# Allegro board newtools.brd
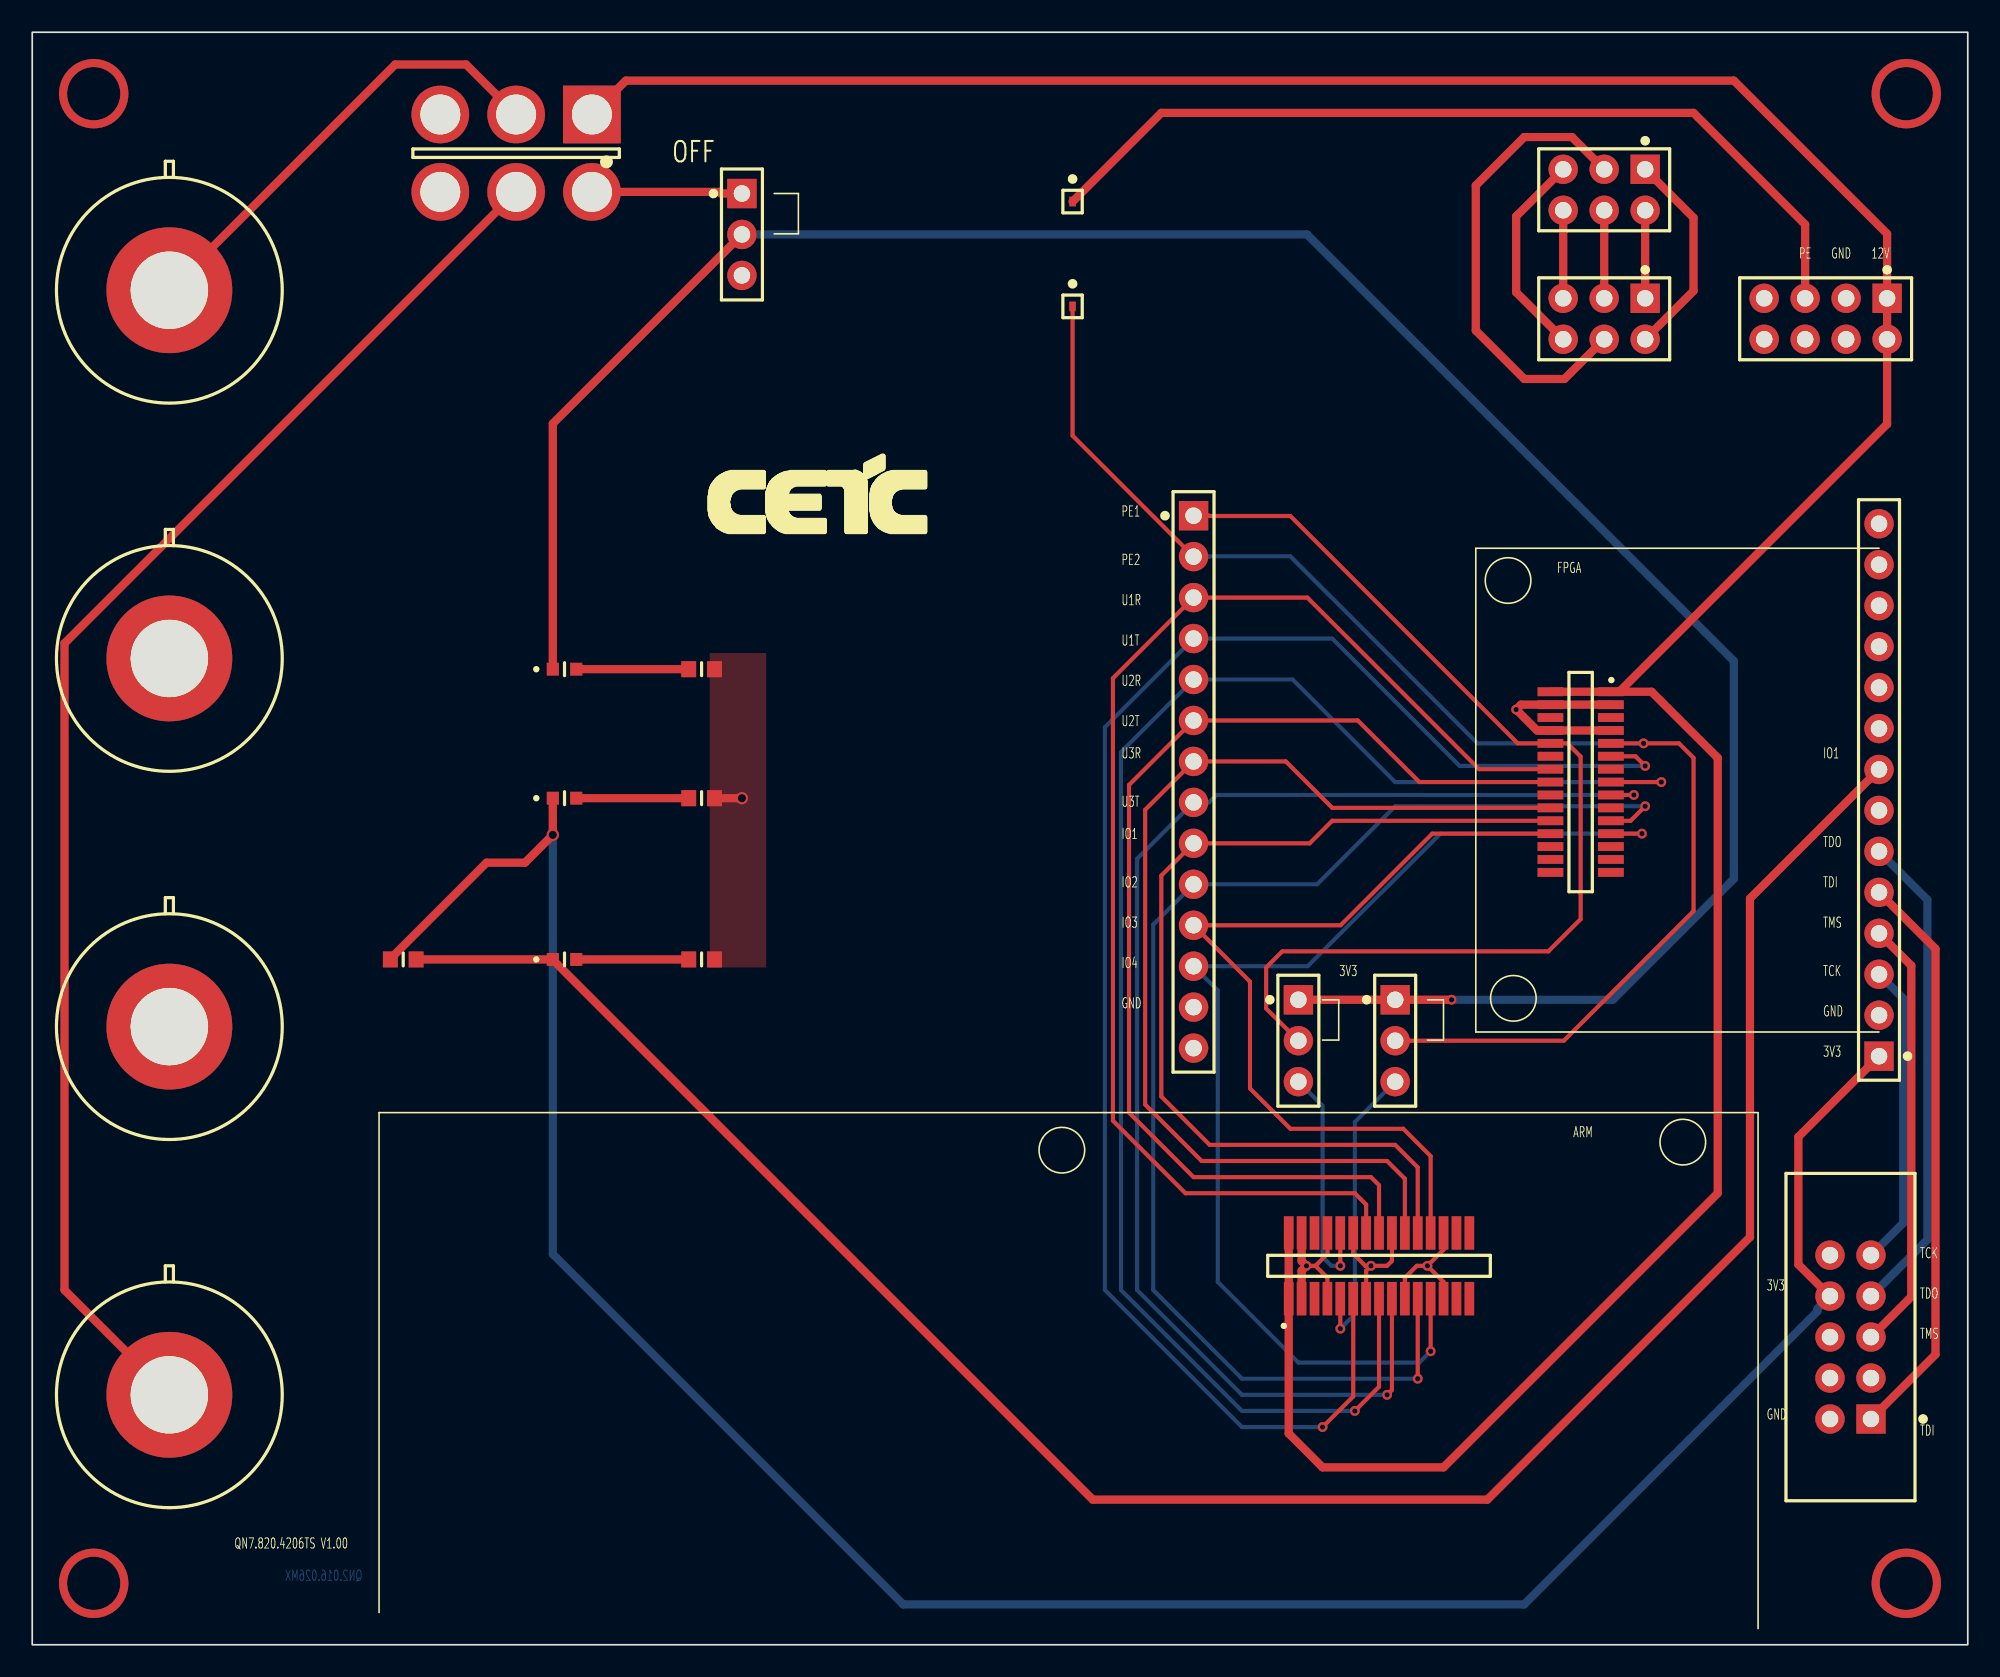
[diagram p0: board, top side]
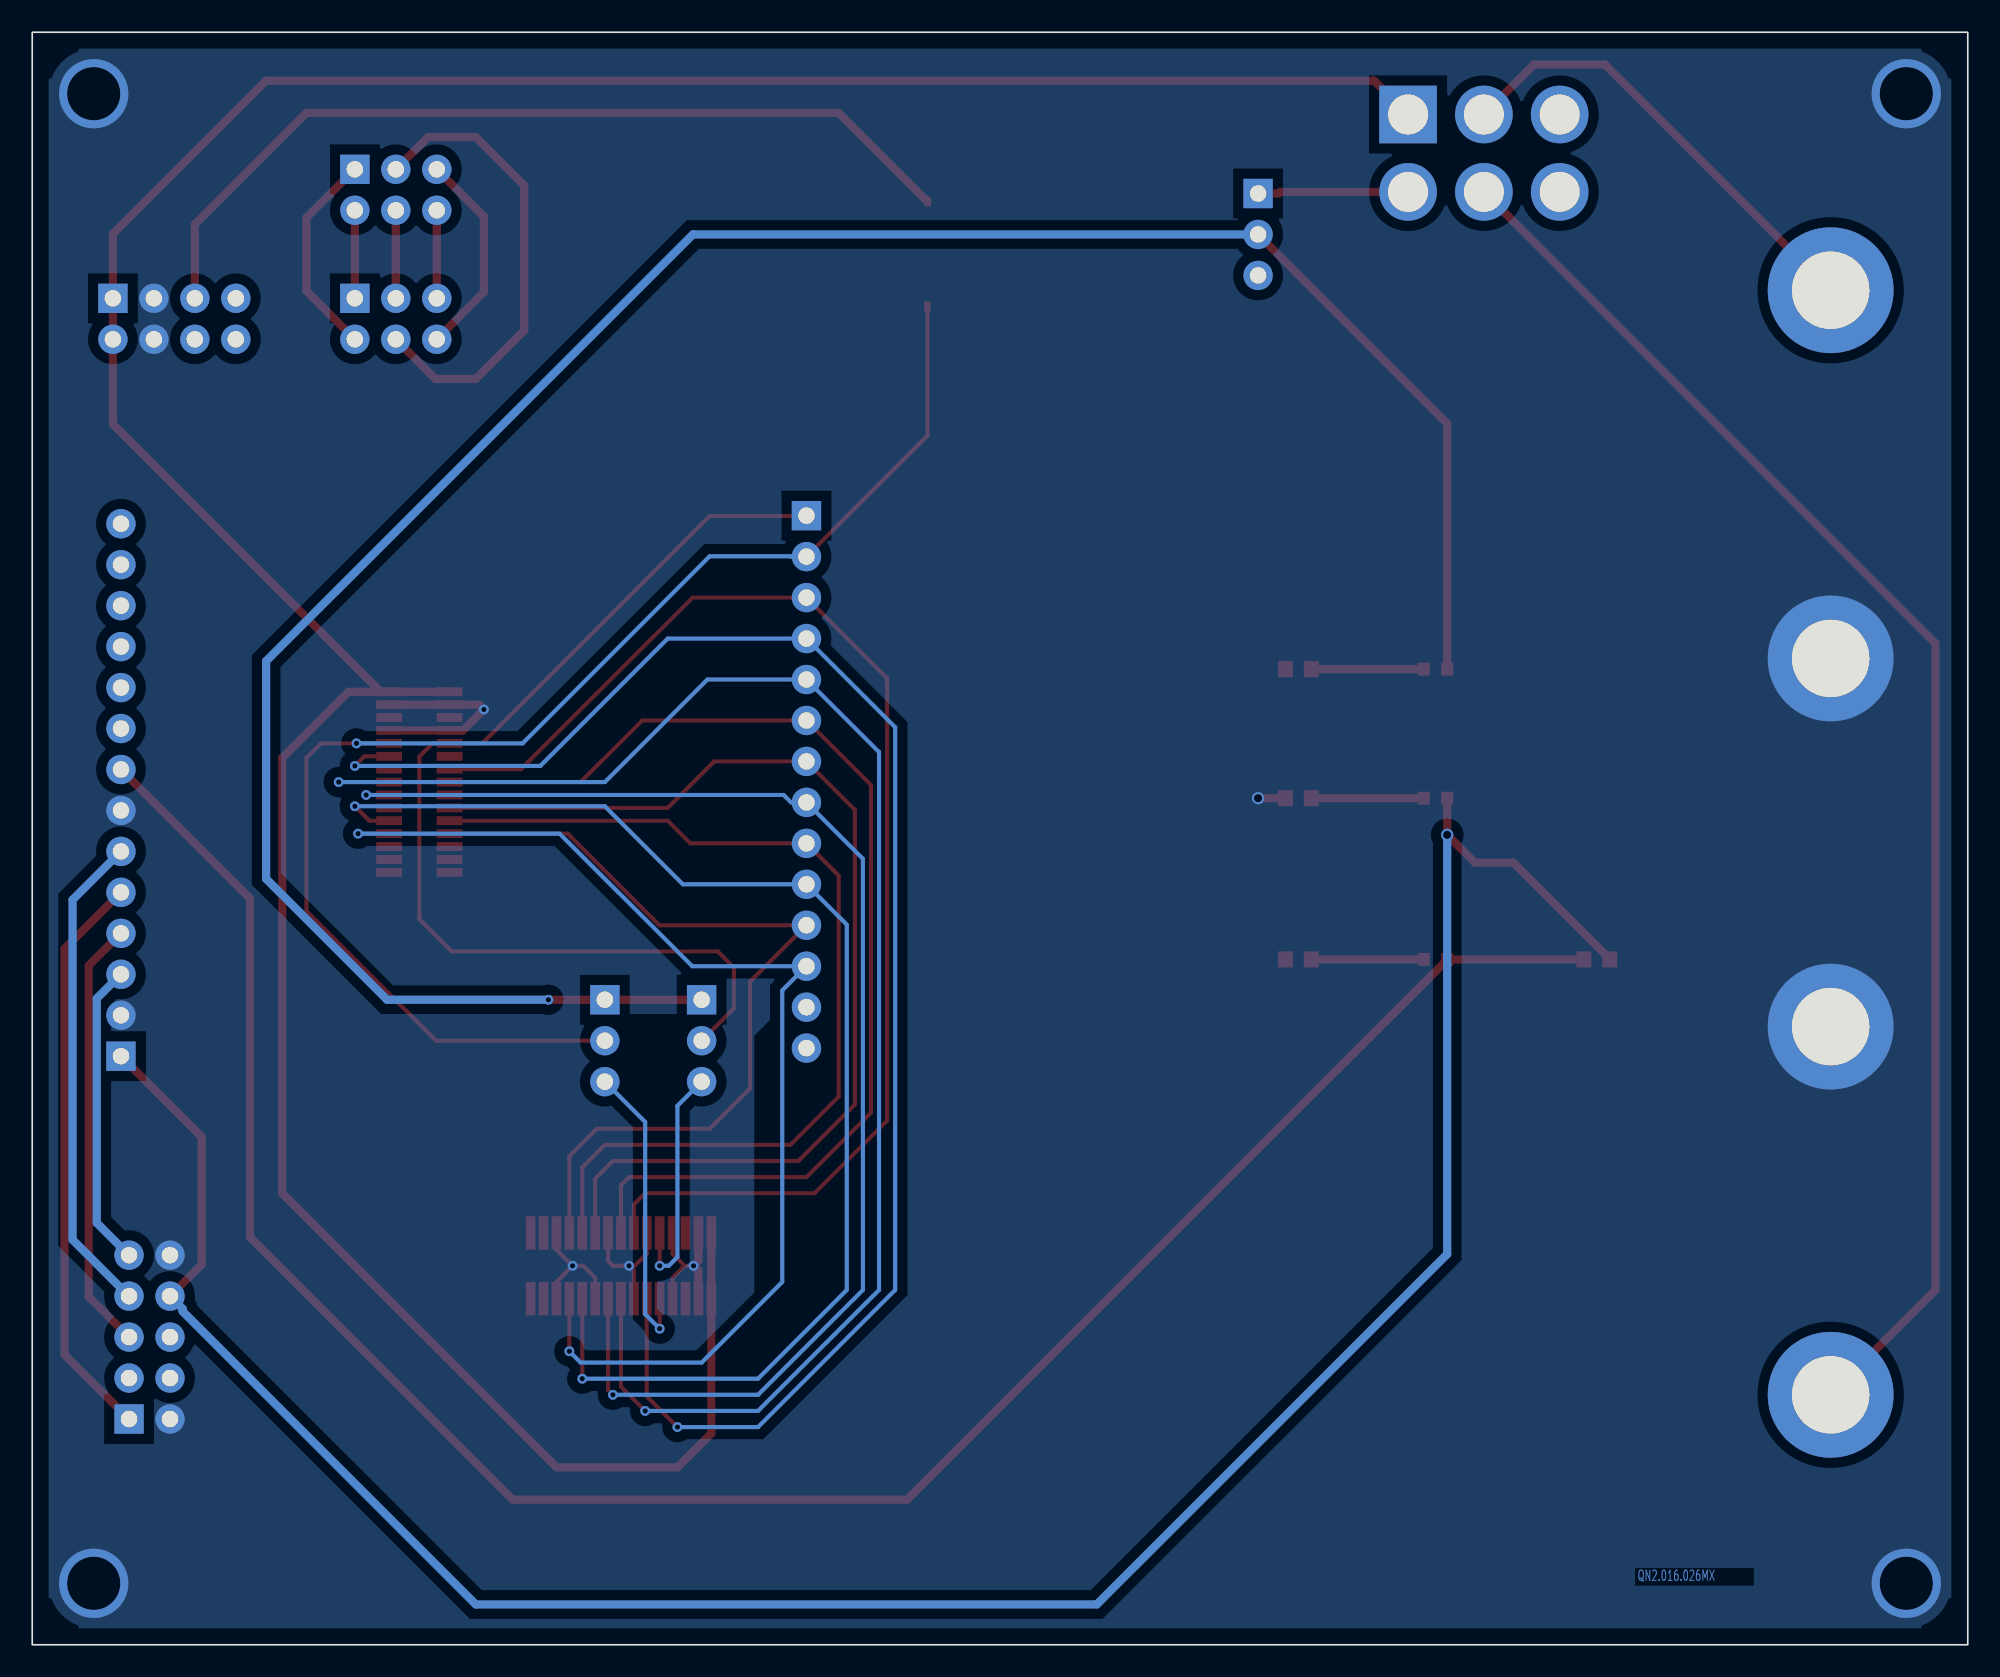
[diagram p1: board, bottom side, seen from below]

Outline 120 x 100 mm; copper layers: TOP, BOTTOM. Coordinates in mm from the lower left corner of the outline.
Outline path: rectangle 0,0 120,100 ; 0,100 0,0 120,0 120,100 0,100

## Placement (name value [footprint] x y rotation side)
CONF  LED  [LEDC0603]  33 42.5 0 top
EN1  HEADER 3  [SHDR0S254P3X1]  78.5 40 270 top
EN2  HEADER 3  [SHDR0S254P3X1]  84.5 40 270 top
EN3  HEADER 3  [SHDR0S254P3X1]  44 90 270 top
FPGA  LED  [LEDC0603]  33 52.5 0 top
GND1  CON1  [M4]  8.5 61.17 0 top
GND2  CON1  [M4]  8.5 38.33 0 top
J1  HEADER 14  [SHDR0S254P14X1]  72 70.02 270 top
J2  HEADER 3X2  [SHDR0S254P3X2]  100 91.5 180 top
J3  HEADER 3X2  [SHDR0S254P3X2]  100 83.5 180 top
J4  HEADER 15x2/SM  [52463071]  96 53.5 90 top
J5  HEADER 4X2  [SHDR0S254P4X2]  115 83.5 180 top
J6  HEADER 14  [SHDR0S254P14X1]  114.5 36.5 90 top
J7  CONN PCB 15x2-P  [533643027]  83.5 23.5 180 top
JTAG  HEADER 5X2  [SHDR0S254P5X2_JTAG]  114 14 90 top
NOREF  -  []  0 0 90 top
NOREF#2  -  []  0 0 0 top
ON  SW KEY-DPDT  [MTS202]  30 92.5 270 top
R1  220R/1%  [RESC0603]  41.5 60.5 0 top
R2  220R/1%  [RESC0603]  41.5 52.5 0 top
R3  220R/1%  [RESC0603]  41.5 42.5 0 top
R4  330R/1%  [RESC0603]  23 42.5 0 top
TP1  TEST POINT  [TP_4_6]  64.5 89.5 0 top
TP2  TEST POINT  [TP_4_6]  64.5 83 0 top
UNK3V3  CON1  [M4]  8.5 15.5 0 top
UNK12V  CON1  [M4]  8.5 84 0 top
VCC  LED  [LEDC0603]  33 60.5 0 top

## Library data of the parts
CONF FPGA VCC = LED
EN1-EN3 = HEADER 3
GND1 GND2 UNK3V3 UNK12V = CON1
J1 J6 = HEADER 14
J2 J3 = HEADER 3X2
J4 = HEADER 15x2/SM_0
J5 = HEADER 4X2
J7 = CONN PCB 15x2-P_0
JTAG = HEADER 5X2
ON = SW KEY-DPDT_0
R1-R4 = RESISTOR
TP1 TP2 = TEST POINT

## Footprints (pads in the part's own frame, mm; a bottom-side part is the same pattern mirrored in y, then rotated)
52463071
  rect 0.55x1.6 smd: 1(5.6,-1.875) 2(4.8,-1.875) 3(4,-1.875) 4(3.2,-1.875) 5(2.4,-1.875) 6(1.6,-1.875) 7(0.8,-1.875) 8(0,-1.875) 9(-0.8,-1.875) 10(-1.6,-1.875) 11(-2.4,-1.875) 12(-3.2,-1.875) 13(-4,-1.875) 14(-4.8,-1.875) 15(-5.6,-1.875) 16(-5.6,1.875) 17(-4.8,1.875) 18(-4,1.875) 19(-3.2,1.875) 20(-2.4,1.875) 21(-1.6,1.875) 22(-0.8,1.875) 23(0,1.875) 24(0.8,1.875) 25(1.6,1.875) 26(2.4,1.875) 27(3.2,1.875) 28(4,1.875) 29(4.8,1.875) 30(5.6,1.875)
533643027
  rect 0.6x2.075 smd: 1(5.6,2.038) 2(4.8,2.038) 3(4,2.038) 4(3.2,2.038) 5(2.4,2.038) 6(1.6,2.038) 7(0.8,2.038) 8(0,2.038) 9(-0.8,2.038) 10(-1.6,2.038) 11(-2.4,2.038) 12(-3.2,2.038) 13(-4,2.038) 14(-4.8,2.038) 15(-5.6,2.038) 16(-5.6,-2.038) 17(-4.8,-2.038) 18(-4,-2.038) 19(-3.2,-2.038) 20(-2.4,-2.038) 21(-1.6,-2.038) 22(-0.8,-2.038) 23(0,-2.038) 24(0.8,-2.038) 25(1.6,-2.038) 26(2.4,-2.038) 27(3.2,-2.038) 28(4,-2.038) 29(4.8,-2.038) 30(5.6,-2.038)
LEDC0603
  rect 0.75x0.8 smd: 1(0.725,0) 2(-0.725,0)
M4
  round 7.8 hole 4.8: 1(0,0)
MTS202
  rect 3.575x3.575 hole 2.475: 1(-2.4,4.7)
  round 3.575 hole 2.475: 2(-2.4,0) 3(-2.4,-4.7) 4(2.4,-4.7) 5(2.4,0) 6(2.4,4.7)
RESC0603
  rect 0.925x1 smd: 1(-0.8,0) 2(0.8,0)
SHDR0S254P3X1
  rect 1.82x1.82 hole 1.02: 1(0,0)
  round 1.82 hole 1.02: 2(2.54,0) 3(5.08,0)
SHDR0S254P3X2
  rect 1.82x1.82 hole 1.02: 1(0,0)
  round 1.82 hole 1.02: 2(0,2.54) 3(2.54,0) 4(2.54,2.54) 5(5.08,0) 6(5.08,2.54)
SHDR0S254P4X2
  rect 1.82x1.82 hole 1.02: 1(0,0)
  round 1.82 hole 1.02: 2(0,2.54) 3(2.54,0) 4(2.54,2.54) 5(5.08,0) 6(5.08,2.54) 7(7.62,0) 8(7.62,2.54)
SHDR0S254P5X2_JTAG
  rect 1.82x1.82 hole 1.02: 1(0,0)
  round 1.82 hole 1.02: 2(0,2.54) 3(2.54,0) 4(2.54,2.54) 5(5.08,0) 6(5.08,2.54) 7(7.62,0) 8(7.62,2.54) 9(10.16,0) 10(10.16,2.54)
SHDR0S254P14X1
  rect 1.82x1.82 hole 1.02: 1(0,0)
  round 1.82 hole 1.02: 2(2.54,0) 3(5.08,0) 4(7.62,0) 5(10.16,0) 6(12.7,0) 7(15.24,0) 8(17.78,0) 9(20.32,0) 10(22.86,0) 11(25.4,0) 12(27.94,0) 13(30.48,0) 14(33.02,0)
TP_4_6
  rect 0.4x0.6 smd: 1(0,0)

## Nets
3V: EN1.1 EN2.1 EN3.2 VCC.2(ANODE)
3V_IN: ON.5(COMMON2) UNK3V3.1
12V: J4.1 J4.30 J5.1 J5.2 J7.1 J7.30 ON.1(NC1)
12V_IN: ON.2(COMMON1) UNK12V.1
GND: GND1.1 GND2.1 J4.2 J4.4 J4.27 J4.29 J5.3 J5.4 J6.2 J6.7 J7.2 J7.4 J7.7 J7.10 J7.13 J7.18 J7.22 J7.25 J7.27 J7.29 JTAG.2 JTAG.10 R1.2 R2.2 R3.2
ARM_GPIO1: J1.9 J4.20 J7.20
ARM_GPIO2: J1.10 J4.11 J7.11
ARM_GPIO3: J1.11 J4.19 J7.19
ARM_GPIO4: J1.12 J4.12 J7.12
ARM_UART1_RX: J1.3 J4.24 J7.24
ARM_UART1_TX: J1.4 J4.6 J7.6
ARM_UART2_RX: J1.5 J4.8 J7.8
ARM_UART2_TX: J1.6 J4.23 J7.23
ARM_UART3_RX: J1.7 J4.21 J7.21
ARM_UART3_TX: J1.8 J4.9 J7.9
AUX_GPIO1: CONF.2(ANODE) J6.8 R4.2
F_3V3: FPGA.2(ANODE) J6.1 JTAG.8 R4.1
FPGA_TCK: J6.3 JTAG.9
FPGA_TDI: J6.5 JTAG.1
FPGA_TDO: J6.6 JTAG.7
FPGA_TMS: J6.4 JTAG.5
POWEN1: EN1.2 J1.1 J4.26
POWEN2: EN2.2 J1.2 J4.5 TP2.1
POWER_EN1: EN1.3 J7.26
POWER_EN2: EN2.3 J7.5
TP1: J5.5 TP1.1
N13544559: CONF.1(CATHODE) R3.1
N13546246: J2.2 J3.1
N13546248: J2.4 J3.3
N13546250: J2.6 J3.5
N13546258: J2.5 J3.6
N13546270: J2.3 J3.4
N13546295: J2.1 J3.2
N13554336: EN3.1 ON.6(NC2)
N135435511: R1.1 VCC.1(CATHODE)
N135437851: FPGA.1(CATHODE) R2.1

Pads without a net: EN3 3; J1 13 14; J4 3 7 10 13 14 15 16 17 18 22 25 28; J5 6 7 8; J6 9 10 11 12 13 14; J7 3 14 15 16 17 28; JTAG 3 4 6; ON 3 4

## Via types
v1: diameter 0.61, hole 0.33, TOP to BOTTOM, 18 vias
v2: diameter 0.762, hole 0.508, TOP to BOTTOM, 2 vias
v3: diameter 4.3, hole 3.3, TOP to BOTTOM, 4 vias

## Routing (per net, layer and track width the routed paths; a pad name or vN(x,y) marks a point on that pad's centre or on a via; arc(x,y) is an arc through that point)
3V: length 148.4
  TOP w0.508: EN1.1 EN2.1 v1(88,40) ; EN3.2 32.27,75.73 VCC.2
  BOTTOM w0.508: 78,40 EN1.1 ; EN3.2 79.04,87.46 105.5,61 105.5,47.5 98,40 v1(88,40)
3V_IN: length 88.9
  TOP w0.508: UNK3V3.1 2,22 2,62.1 ON.5
12V: length 206.4
  TOP w0.508: J4.30 J4.1 98.4,59.1 ; 98.4,59.1 100.4,59.1 104.5,55 104.5,28 87.5,11 80,11 77.9,13.1 J7.1 J7.30 ; 98.4,59.1 115,75.7 J5.2 J5.1 115,87.5 105.5,97 36.8,97 ON.1
12V_IN: length 28.6
  TOP w0.508: UNK12V.1 22.5,98 26.9,98 ON.2
GND: length 39.6
  TOP w0.254: J7.18 87.5,24.5 v1(86.5,23.5) ; v1(86.5,23.5) 85.85,23.5 85.1,22.75 J7.10 ; v1(86.5,23.5) 87.5,22.5 J7.13 ; 79.56,23.5 80.3,24.24 J7.27 ; 79.56,23.5 80.3,22.76 J7.4 ; 79.56,23.5 v1(79,23.5) ; J7.25 81.9,24.25 82.65,23.5 v1(83,23.5) ; J7.7 82.7,23.2 v1(83,23.5) ; v1(83,23.5) 84,23.5 84.3,23.8 J7.22
  TOP w0.508: J4.2 J4.29 92.3,58.3 v1(92,58) 93.3,56.7 J4.27 J4.4 ; R2.2 v2(44,52.5) ; J7.2 78.7,23.2 v1(79,23.5) 78.7,23.8 J7.29
  vias: v3(3.81,96.19) v3(3.81,3.81) v3(116.19,96.19) v3(116.19,3.81)
ARM_GPIO1: length 61
  TOP w0.254: J4.20 80.6,51.1 79.2,49.7 J1.9 70,47.7 70,34 73,31 84.5,31 85.9,29.6 J7.20
ARM_GPIO2: length 82.3
  TOP w0.254: J4.11 99.1,51.1 v1(100,52) ; J7.11 v1(85.9,16.5)
  BOTTOM w0.254: v1(85.9,16.5) 75,16.5 69.5,22 69.5,44.66 J1.10 79.66,47.16 84.5,52 v1(100,52)
ARM_GPIO3: length 53.7
  TOP w0.254: J7.19 86.7,30.3 85,32 78,32 75.5,34.5 75.5,41.12 J1.11 81.12,44.62 86.8,50.3 J4.19
ARM_GPIO4: length 72.2
  TOP w0.254: J4.12 v1(99.8,50.3) ; J7.12 v1(86.7,18.2)
  BOTTOM w0.254: v1(99.8,50.3) 87.3,50.3 79.08,42.08 J1.12 73.5,40.58 73.5,22.5 78.5,17.5 86,17.5 v1(86.7,18.2)
ARM_UART1_RX: length 80.7
  TOP w0.254: J4.24 89.7,54.3 79.06,64.94 J1.3 67,59.94 67,32.5 71.5,28 82,28 82.7,27.3 J7.24
ARM_UART1_TX: length 102.1
  TOP w0.254: J7.6 81.9,15.4 v1(80,13.5) ; J4.6 99.4,55.1 v1(100,54.5)
  BOTTOM w0.254: v1(80,13.5) 75,13.5 66.5,22 66.5,56.9 J1.4 80.6,62.4 88.5,54.5 v1(100,54.5)
ARM_UART2_RX: length 99.7
  TOP w0.254: J7.8 83.5,16 v1(82,14.5) ; J4.8 v1(101,53.5)
  BOTTOM w0.254: v1(101,53.5) 84.5,53.5 78.14,59.86 J1.5 67.5,55.36 67.5,22 75,14.5 v1(82,14.5)
ARM_UART2_TX: length 70
  TOP w0.254: J4.23 86,53.5 82.18,57.32 J1.6 68,53.32 68,33 72,29 83,29 83.5,28.5 J7.23
ARM_UART3_RX: length 67.2
  TOP w0.254: J7.21 85.1,28.9 84,30 72.5,30 69,33.5 69,51.78 J1.7 77.72,54.78 80.6,51.9 J4.21
ARM_UART3_TX: length 84.9
  TOP w0.254: J7.9 84.3,15.8 v1(84,15.5) ; J4.9 v1(99.3,52.7)
  BOTTOM w0.254: v1(99.3,52.7) 73.41,52.7 72.95,52.24 J1.8 68.5,48.74 68.5,22 75,15.5 v1(84,15.5)
AUX_GPIO1: length 135.6
  TOP w0.508: J6.8 106.5,46.28 106.5,25.28 90.22,9 65.75,9 32.27,42.47 CONF.2 R4.2
F_3V3: length 155.5
  TOP w0.508: J6.1 109.5,31.5 109.5,23.58 JTAG.8 ; R4.1 22.2,42.54 28.16,48.5 30.55,48.5 v2(32.27,50.22) FPGA.2
  BOTTOM w0.508: JTAG.8 110.68,20.84 110.68,20.68 92.5,2.5 54,2.5 32.27,24.22 v2(32.27,50.22)
FPGA_TCK: length 18.9
  BOTTOM w0.508: J6.3 116,40.08 116,26.16 JTAG.9
FPGA_TDI: length 35.8
  TOP w0.508: JTAG.1 118,18 118,43.16 J6.5
FPGA_TDO: length 30.3
  BOTTOM w0.508: JTAG.7 117.5,25.12 117.5,46.2 J6.6
FPGA_TMS: length 26.9
  TOP w0.508: J6.4 116.5,42.12 116.5,21.58 JTAG.5
POWEN1: length 66.4
  TOP w0.254: EN1.2 76.5,39.46 76.5,42 77.5,43 94,43 96,45 96,55.08 95.18,55.9 J4.26 92.1,55.9 78,70 72.97,70 72.95,70.02 J1.1
POWEN2: length 88.2
  TOP w0.254: EN2.2 94.96,37.46 103,45.5 103,55 102.1,55.9 v1(99.9,55.9) J4.5 ; J1.2 64.5,74.98 TP2.1
  BOTTOM w0.254: J1.2 72.95,67.48 72.97,67.5 78,67.5 89.6,55.9 v1(99.9,55.9)
POWER_EN1: length 14.9
  TOP w0.254: J7.26 v1(81.1,23.5)
  BOTTOM w0.254: v1(81.1,23.5) 80.54,23.5 80,24.04 80,33.42 EN1.3
POWER_EN2: length 18.6
  TOP w0.254: J7.5 v1(81.1,19.6)
  BOTTOM w0.254: v1(81.1,19.6) 82,20.5 82,32.42 EN2.3
TP1: length 55.1
  TOP w0.508: TP1.1 70,95 103,95 109.92,88.08 J5.5
N13544559: length 7
  TOP w0.508: CONF.1 R3.1
N13546246: length 5.5
  TOP w0.508: J2.2 J3.1
N13546248: length 5.5
  TOP w0.508: J2.4 J3.3
N13546250: length 5.5
  TOP w0.508: J2.6 J3.5
N13546258: length 13
  TOP w0.508: J2.5 92,88.58 92,83.88 J3.6
N13546270: length 29.3
  TOP w0.508: J3.4 95,78.5 92.5,78.5 89.5,81.5 89.5,90.5 92.5,93.5 95.46,93.5 J2.3
N13546295: length 13
  TOP w0.508: J2.1 103,88.5 103,83.96 J3.2
N13554336: length 9.3
  TOP w0.508: EN3.1 42.71,90 42.61,90.1 ON.6
N135435511: length 7
  TOP w0.508: VCC.1 R1.1
N135437851: length 7
  TOP w0.508: FPGA.1 R2.1

## Copper pours and planes (outline as drawn; the poured copper is in the pictures)
GND on TOP: 42,61.5 42,42 45.5,42 45.5,61.5
GND on BOTTOM: 1.02,1.02 1.02,98.98 118.98,98.98 118.98,1.02 ; 19 cut-outs

## Text on the board
BOTTOM: QN2.016.026MX
Ref Des/Silkscreen Top: QN7.820.4206TS V1.00 | PE1 | PE2 | U1R | U1T | U2R | U2T | U3R | U3T | IO1 | IO2 | IO3 | IO4 | GND | 3V3 | FPGA | ARM | PE | TDO | TDI | TMS | TCK | 12V | OFF
NCLEGEND-1-2: FIGURE | SIZE | 13.0 | 20.0 | 23.622 | 25.591 | 40.157 | 97.441 | 129.921 | 188.976 | DRILL CHART: TOP to BOTTOM | ALL UNITS ARE IN MILS | PLATED | QTY | 18 | 2 | 28 | 10 | 29 | 6 | 4
